# Altium PCB PCB.PcbDoc
Units mm, origin at the board's own origin, x right, y up, seen from the top; angles counter-clockwise.
Board outline 41.5 x 41.5 mm, 2 copper layers (Top Layer, Bottom Layer); 42 components, 49 nets, 202 pads, 78 vias.
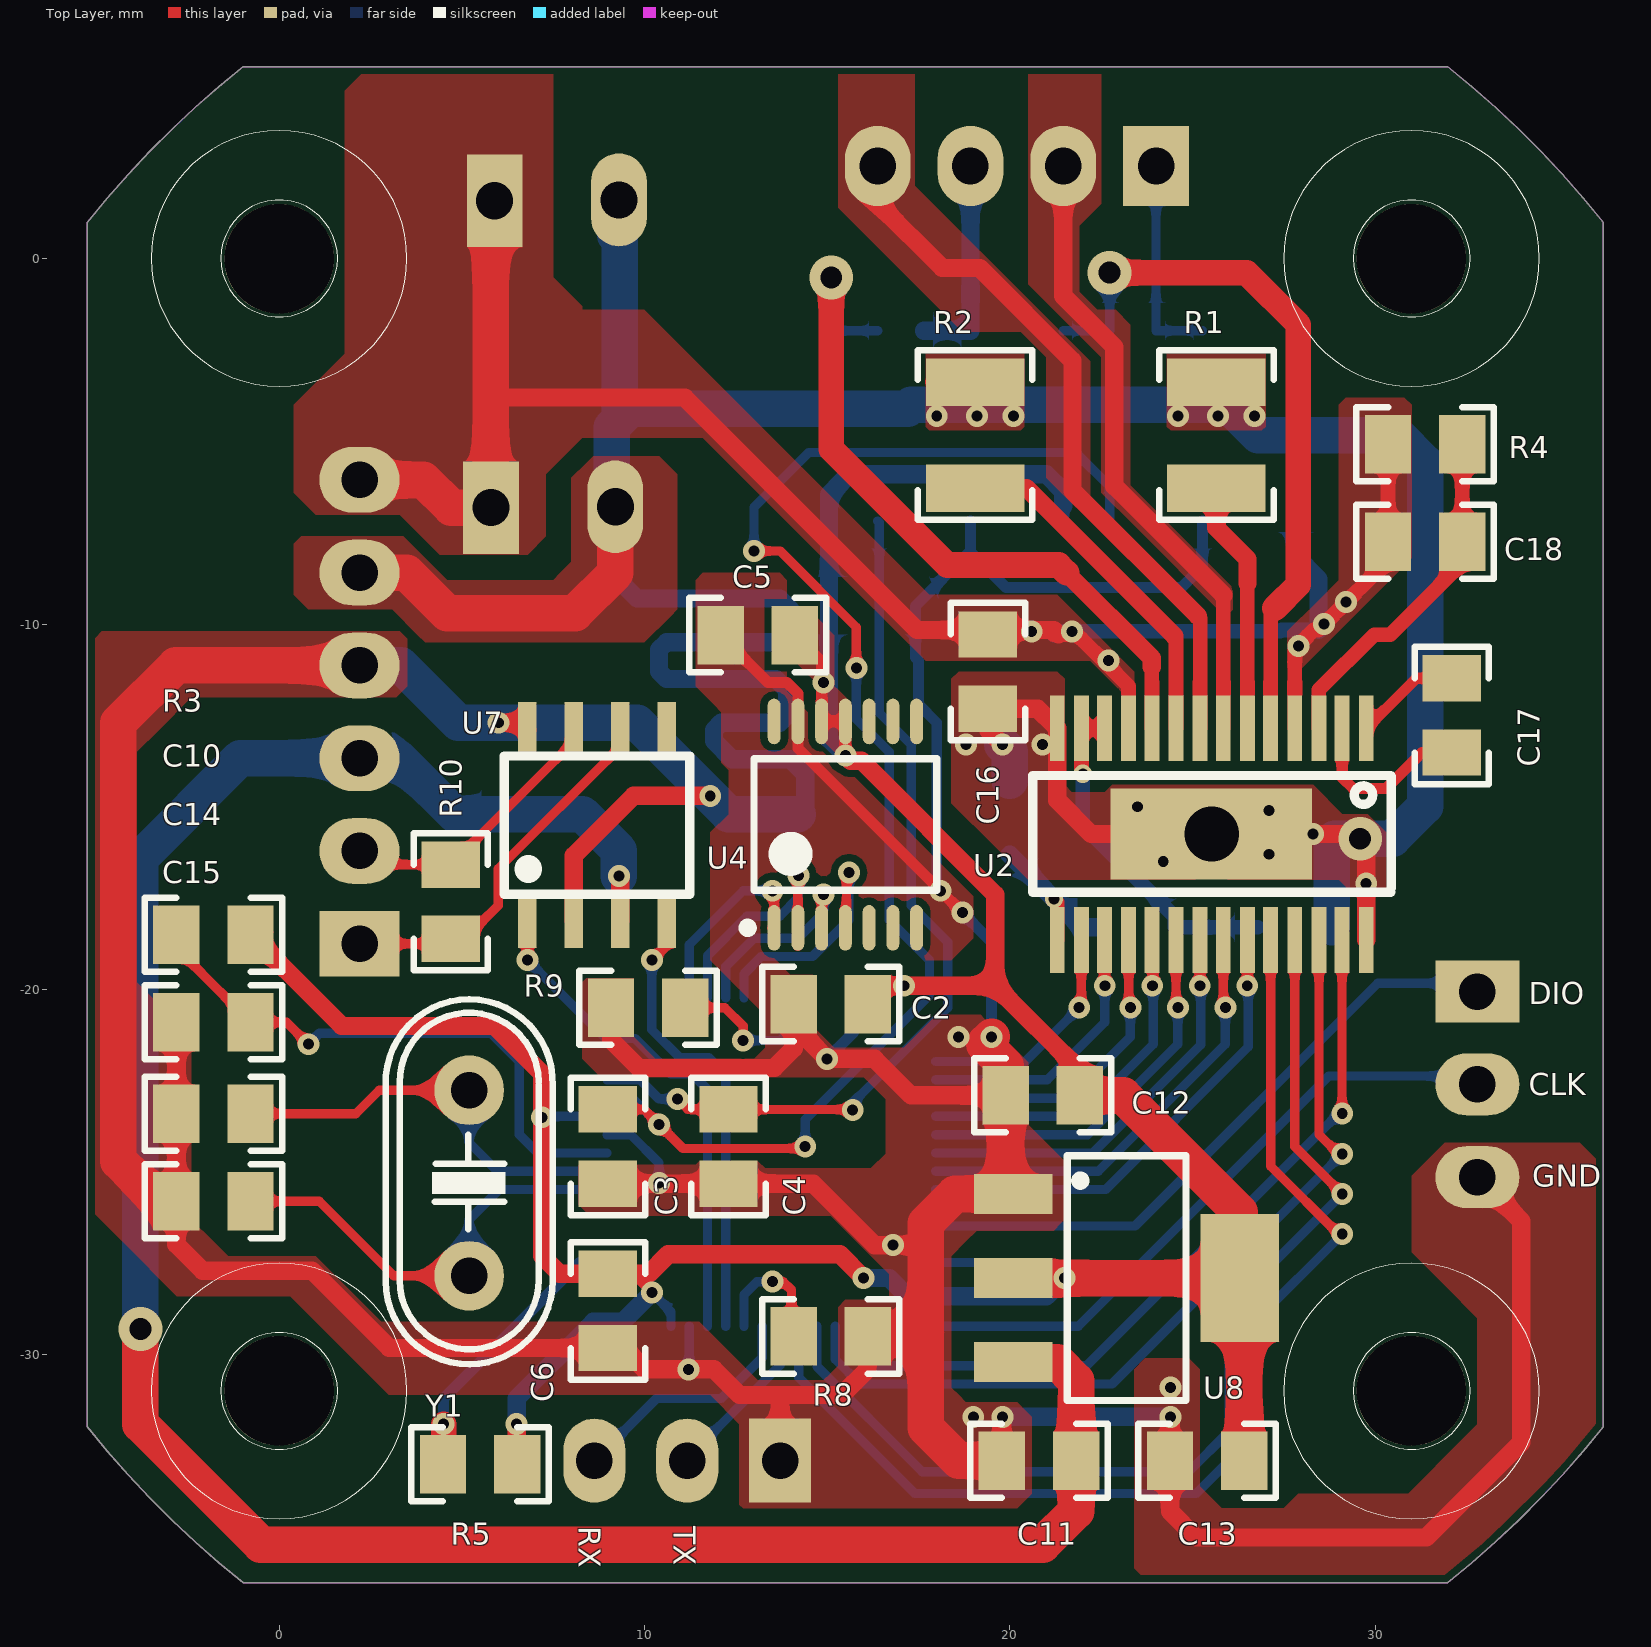
[diagram p0: Top Layer view]
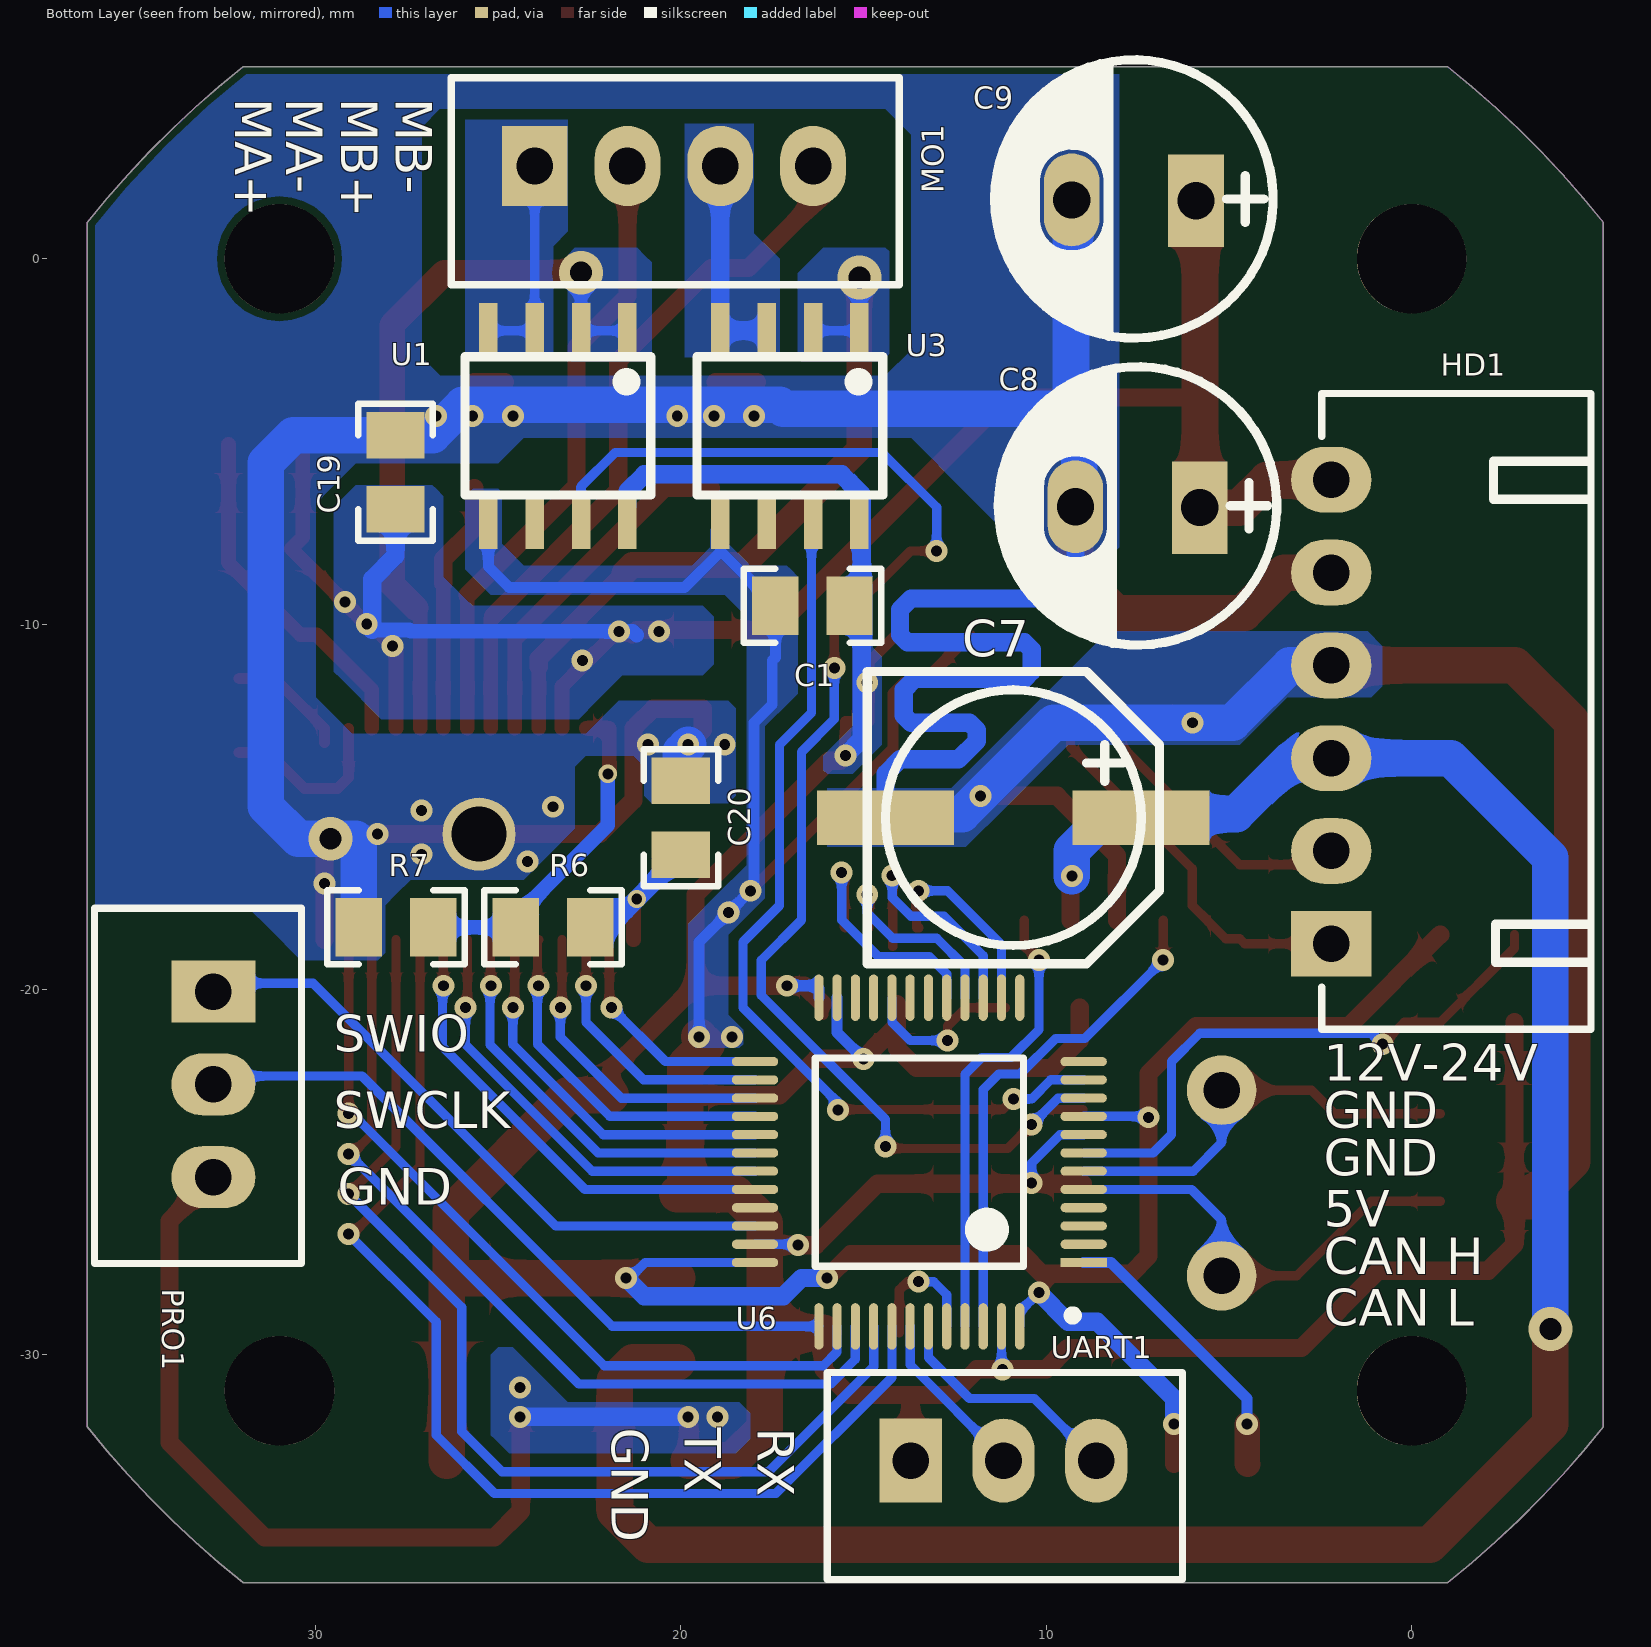
[diagram p1: Bottom Layer view, seen from below]

## Layer stack, top to bottom
Top Solder: solder mask 0.0102, Solder Resist, Dk 3.5
Top Layer: signal copper 0.0356
Dielectric 1: dielectric 0.32, FR-4, Dk 4.8
Bottom Layer: signal copper 0.0356
Bottom Solder: solder mask 0.0102, Solder Resist, Dk 3.5

## Board outline
-5.252,-31.972 ccw(c15.499,-15.489) -0.984,-36.24 -0.984,-36.239 31.982,-36.239 31.981,-36.24 ccw(c15.499,-15.489) 36.249,-31.972 36.249,0.994 36.249,0.993 ccw(c15.499,-15.489) 31.981,5.261 31.982,5.261 -0.984,5.261 ccw(c15.499,-15.489) -5.252,0.993 -5.251,0.994

## Design rules (kind name [scope] priority, off if disabled: settings)
Clearance [All] p1: gap=0.2
HoleSize [All] p1: absolutevalues=TRUE maxlimit=2.54 minlimit=0.3 maxpercent=80.000 minpercent=20.000
MinimumSolderMaskSliver [All] p1: minsoldermaskwidth=0
PolygonConnect [All] p1: connectstyle=Direct reliefconductorwidth=0.254 reliefentries=4 polygonreliefangle="90 Angle" airgapwidth=0.254
RoutingVias [All] p1: holewidth=1 width=2 viastyle="Through Hole" minholewidth=0.3 minwidth=0.3 maxholewidth=2 maxwidth=5
SilkToBoardRegionClearance [All] p1 off:
SilkToSolderMaskClearance [IsPad] p1: minsilkscreentomaskgap=0 clearancetoexposedcopper=TRUE
SolderMaskExpansion [All] p1: expansion=0.102
Width [All] p1: maxlimit=2.54 minlimit=0.254 preferedwidth=0.508
26 further rules are at their usual default settings.

## Components (designator, comment, footprint, x,y, rotation, side; value= is the part's Value field where it differs from the comment)
C1 "104" 0805_HV 16.4,-9.5 r180 bottom
C2 "104" 0805_HV 15.1,-20.4 r0 top
C3 "104" 0805_HV 9,-24.3 r90 top
C4 "104" 0805_HV 12.3,-24.3 r90 top
C5 "104" 0805_HV 13.1,-10.3 r0 top
C6 "104" 0805_HV 9,-28.8 r90 top
C7 "330uF" TU_NHOM_220uF_25V_MH 10.9,-15.3 r90 bottom
C8 "390uF" CP1/3.0 7.5,-6.8 r0 bottom
C9 "390uF" CP1/3.0 7.6,1.6 r0 bottom
C10 "104" 0805_HV -1.8,-20.9 r0 top
C11 "105" 0805_HV 20.8,-32.9 r0 top
C12 "105" 0805_HV 20.9,-22.9 r0 top
C13 "105" 0805_HV 25.4,-32.9 r0 top
C14 "22P" 0805_HV -1.8,-23.4 r0 top
C15 "22P" 0805_HV -1.8,-25.8 r0 top
C16 "103" 0805_HV 19.4,-11.3 r90 top
C17 "103" 0805_HV 32.1,-12.5 r90 top
C18 "0.1uF" 0805_HV 31.369,-7.747 r180 top
C19 "103" 0805_HV 27.813,-5.842 r270 bottom
C20 "0.47uF" 0805_HV 20,-15.3 r270 bottom
HD1 "Header 6 Cong_MH" "HEADER 6 CONG" 2.2,-12.4 r90 bottom locked
MO1 "Header 4_MH" "HEADER 4" 20.193,2.54 r180 bottom locked
PRO1 "Header 3_MH" "HEADER 3" 32.8,-22.6 r270 bottom locked
R1 "RT0603DRE07140KL" 1210 25.654,-4.826 r90 top
R2 "RT0603DRE07140KL" 1210 19.05,-4.826 r90 top
R3 "10K" 0805_HV -1.8,-18.5 r0 top
R4 "1M" 0805_HV 31.369,-5.08 r180 top
R5 "0R" 0805_HV 5.5,-33 r0 top
R6 "50K" 0805_HV 23.5,-18.3 r180 bottom
R7 "30K" 0805_HV 27.8,-18.3 r180 bottom
R8 "100K" 0805_HV 15.1,-29.5 r180 top
R9 "100K" 0805_HV 10.1,-20.5 r180 top
R10 "120" 0805_HV 4.7,-17.6 r90 top
U1 "ACS711" "SOP 8" 23.368,-4.572 r0 bottom
U2 "DRV8841PWPR" TSSOP-28EP 25.527,-15.748 r270 top
U3 "ACS711" "SOP 8" 17.018,-4.572 r0 bottom
U4 "AS5047D" TSSOP14 15.499,-15.489 r90 top locked
U6 "STM32F103C8T6 LQFP48 _MH" LQFP48 13.5,-24.7 r0 bottom locked
U7 "TJA1050T/CM,118" "SOP 8" 8.7,-15.5 r0 top
U8 "AMS1117-3.3V SOT223 _MH" SOT223 23.2,-27.9 r270 top locked
UART1 "Header 3_MH" "HEADER 3" 11.17,-32.9 r180 bottom
Y1 "8MHZ" XT2 5.2,-25.3 r270 top locked

## Footprints (in the part's own frame and the unit in brackets; to place one, negate y for a bottom-side part, rotate by r counter-clockwise, add the part's x,y. Pads: shape width x height; smd on the part's side, far side on the other; paste and mask are expansions set on the pad)
0805_HV [mil] "0805 with 30mil clearance between pads"
  rect 50x63 smd: 1(-40,0) 2(40,0)
  silkscreen extent -74,-40 74,40, body extent -43,-29 43,29, height 57
1210 [mm] "1210 from SM-752 data"
  rect 1.3x2.7 smd: 1(1.45,0) 2(-1.45,0)
  silkscreen extent -2.32,-1.57 2.32,1.57, body extent -1.7,-1.35 1.7,1.35, height 1.35
CP1/3.0 [mil]
  rect 60x100 hole 40: 1(-67,0.5)
  oval 60x100 hole 40: 2(67,-0.5)
  silkscreen extent -150,-151 150,148, body extent -156,-161 159,154, height 453
"HEADER 3" [mm]
  rect 1.7x2.3 hole 1 paste+0: 1(-2.54,0)
  oval 1.7x2.3 hole 1 paste+0: 2(0,0) 3(2.54,0)
  silkscreen extent -4.83,-3.25 4.9,2.41
"HEADER 4" [mm]
  rect 1.8x2.2 hole 1: 1(-3.81,0)
  oval 1.8x2.2 hole 1: 2(-1.27,0) 3(1.27,0) 4(3.81,0)
  silkscreen extent -6.1,-3.25 6.17,2.41
"HEADER 6 CONG" [mm]
  rect 1.8x2.2 hole 1: 1(-6.35,0)
  oval 1.8x2.2 hole 1: 2(-3.81,0) 3(-1.27,0) 4(1.27,0) 5(3.81,0) 6(6.35,0)
  silkscreen extent -8.69,-7.11 8.71,0.25
LQFP48 [mm]
  rect 1.27x0.25 smd: 1(-4.524,2.775)
  oval 1.27x0.25 smd: 2(-4.524,2.275) 3(-4.524,1.775) 4(-4.524,1.275) 5(-4.524,0.775) 6(-4.524,0.275) 7(-4.524,-0.225) 8(-4.524,-0.725) 9(-4.524,-1.225) 10(-4.524,-1.725) 11(-4.524,-2.225) 12(-4.524,-2.725) 25(4.473,-2.725) 26(4.473,-2.225) 27(4.473,-1.725) 28(4.473,-1.225) 29(4.473,-0.725) 30(4.473,-0.225) 31(4.473,0.275) 32(4.473,0.775) 33(4.473,1.275) 34(4.473,1.775) 35(4.473,2.275) 36(4.473,2.775)
  oval 0.25x1.27 smd: 13(-2.775,-4.473) 14(-2.275,-4.473) 15(-1.775,-4.473) 16(-1.275,-4.473) 17(-0.775,-4.473) 18(-0.275,-4.473) 19(0.225,-4.473) 20(0.725,-4.473) 21(1.225,-4.473) 22(1.725,-4.473) 23(2.225,-4.473) 24(2.725,-4.473) 37(2.725,4.524) 38(2.225,4.524) 39(1.725,4.524) 40(1.225,4.524) 41(0.725,4.524) 42(0.225,4.524) 43(-0.275,4.524) 44(-0.775,4.524) 45(-1.275,4.524) 46(-1.775,4.524) 47(-2.275,4.524) 48(-2.775,4.524)
  silkscreen extent -4.35,-2.82 2.82,4.35, body extent -4.53,-4.47 4.47,4.53, height 1.5
"SOP 8" [mil]
  rect 20x60 smd: 1(-75,-102.5) 2(-25,-102.5) 3(25,-102.5) 4(75,-102.5) 5(75,102.5) 6(25,102.5) 7(-25,102.5) 8(-75,102.5)
  silkscreen extent -100,-74 100,74, body extent -98,-120 100,117, height 63
SOT223 [mm] "SOT-223/SC-73; 4 Leads; Body 6.7 x 7.3 mm, inc. leads (LxW max)"
  rect 1.1x2.15 smd: 1(-2.3,-3.1) 2(0,-3.1) 3(2.3,-3.1)
  rect 3.5x2.15 smd: 4(0,3.1)
  silkscreen extent -3.35,-1.63 3.35,1.63, body extent -3.43,-1.65 3.43,1.65, height 2.54
TSSOP14 [mm] "TSSOP, 14-Leads, Body 5.00x4.40mm, Pitch 0.65mm, IPC High Density"
  oval 1.25x0.35 smd: 1(-2.825,1.95) 2(-2.825,1.3) 3(-2.825,0.65) 4(-2.825,0) 5(-2.825,-0.65) 6(-2.825,-1.3) 7(-2.825,-1.95) 8(2.825,-1.95) 9(2.825,-1.3) 10(2.825,-0.65) 11(2.825,0) 12(2.825,0.65) 13(2.825,1.3) 14(2.825,1.95)
  silkscreen extent -2.95,-2.5 1.8,2.8, body extent -3.23,-2.55 3.23,2.55, height 1.25
TSSOP-28EP [mil]
  rect 71x16 smd: 1(-114,166.5) 2(-114,140.5) 3(-114,115.5) 4(-114,89.5) 5(-114,63.5) 6(-114,38.5) 7(-114,12.5) 8(-114,-12.5) 9(-114,-38.5) 10(-114,-64.5) 11(-114,-89.5) 12(-114,-115.5) 13(-114,-140.5) 14(-114,-166.5) 15(114,-166.5) 16(114,-140.5) 17(114,-115.5) 18(114,-89.5) 19(114,-64.5) 20(114,-38.5) 21(114,-12.5) 22(114,12.5) 23(114,38.5) 24(114,63.5) 25(114,89.5) 26(114,115.5) 27(114,140.5) 28(114,166.5)
  rect 98x217 smd: 29(0,-0.5)
  silkscreen extent -63,-193 63,194, body extent -126,-191 126,191, height 46
TU_NHOM_220uF_25V_MH [mm]
  rect 1.5x3.75 smd: 1(0,-3.5) 2(0,3.5)
  silkscreen extent -4,-4 4,4, body extent -4.15,-5 4.15,4, height 11.23
XT2 [mm] "Footpin for Crystal 2 pin"
  round 1.905 hole 1: 1(-2.54,0) 2(2.54,0)
  silkscreen extent -5.03,-2.29 4.96,2.29, body extent -5.93,-2.36 5.42,2.29, height 3.5

## Part data
C1 C2 C3 C4 C5 C6 C10 C16 C17 C18 C19 C20: library part "Capacitor 0805", "Ceramic Chip Capacitor - Standard"
C7: library part TU_NHOM_330uF_16V_MH, "TU_NHOM_330uF_16V_MH"
C8 C9: library part "Capacitor TuHoa"
C11 C12 C13 C14 C15: library part CM, "Cap SMD"
HD1: "Header 6P XH2.54 cong"
MO1: "Header 4P XH2.54 th?ng"
PRO1 UART1: "Header 3P XH2.54 th?ng"
R1 R2: "RES, 140 k, 0.5%, 0.1 W, 0603"
R3 R4 R5 R6 R7 R8 R9 R10: library part "R nho", "RES, 100, 1%, 0.1 W, 0402"
U1 U3: library part ACS712
Y1: library part "CRYSTAL_49S DIP_MH", "Crystal Oscillator"

## Free pads (board coordinates)
  round 3 hole 3: 0(0,-30.988) 0(0,0) 0(30.988,-30.988) 0(30.988,0)
  round 2 hole 1.5: 0(25.527,-15.748)

## Via types
v1: diameter 0.6, hole 0.3, Top Layer to Bottom Layer, tented both sides, 66 vias
v2: diameter 0.6, hole 0.3, Top Layer to Bottom Layer, 6 vias
v3: diameter 1.2, hole 0.6, Top Layer to Bottom Layer, tented both sides, 4 vias
v4: diameter 0.5, hole 0.3, Top Layer to Bottom Layer, tented both sides, 2 vias

## Nets (pads, with @x,y where several pads share a name; then routed paths per layer and width w, separated by ;. In a path a pad name is that pad's centre, name@x,y a point inside that pad or via, vN(x,y) a via of type N, cw(c..) or ccw(c..) an arc to the next point about the centre after c; other vN are vias at no path point)
3.3V: C1.2 C2.2 C5.2 C6.2 C12.2 C13.2 R3.2 R5.2 U1.8 U3.8 U4.11 U4.12 U6.9 U6.24 U6.36 U6.48 U8.2 U8.4 | length 99.3
  Top Layer w0.254: C6.2@9.684,-27.784 v1(10.2,-28.3)
  Top Layer w0.3: R5.2@6.5,-32.984 R5.2 ; C5.2 14.849,-11.033 U4.12 U4.11 15.5,-12.666 v1(15.5,-13.6) ; C2.2@16.116,-20.684 C2.2
  Top Layer w0.5: R3.2 1.716,-21 5.9,-21 7.2,-22.3 v1(7.2,-23.5) 7.2,-27.3 7.684,-27.784 9.684,-27.784 10.116,-27.784 10.65,-27.25 15.35,-27.25 v1(16,-27.9) ; R5.2@6.5,-32.984 v2(6.5,-31.9) ; v1(15.5,-13.6) 15.639,-13.739 15.939,-13.739 19.6,-17.4 19.6,-19.9 ; C2.2 16.616,-19.9 v1(17.1,-19.9) 19.6,-19.9 ; C12.2 21.916,-22.216 19.6,-19.9
  Top Layer w1: U8.2 U8.4 ; C12.2 23.1,-22.9 26.3,-26.1 U8.4 ; C13.2 26.416,-28.016 U8.4
  Bottom Layer w0.254: v1(7.2,-23.5) 7.225,-23.475 U6.9 ; v1(10.2,-28.3) 10.725,-28.825 U6.48 ; U6.36 20.975,-27.475 21.4,-27.9 v1(21.5,-27.9)
  Bottom Layer w0.3: U6.24 16.225,-19.975 16.3,-19.9 v1(17.1,-19.9) ; U1.8 U1.8@21.463,-6.763
  Bottom Layer w0.5: v2(6.5,-31.9) 6.5,-31.2 8.6,-29.1 9.4,-29.1 v1(10.2,-28.3) ; v1(15.5,-13.6) 15.05,-13.15 15.05,-6.45 15.6,-5.9 21,-5.9 21.463,-6.363 U1.8@21.463,-6.763 ; v1(16,-27.9) 16.7,-27.9 17.2,-28.4 21,-28.4 v1(21.5,-27.9)
  other v2: 14.9,-11.6
5V: C7.1 C11.2 HD1.3 U7.3 U8.3 | length 65.6
  Top Layer w0.5: v1(9.3,-16.9) 9.335,-16.935 U7.3
  Top Layer w1: v3(-3.8,-29.3) -3.8,-31.9 -0.5,-35.2 20.9,-35.2 21.816,-34.284 C11.2 21.816,-30.716 21.3,-30.2 U8.3
  Bottom Layer w1: v3(-3.8,-29.3) -3.8,-16.4 -1.07,-13.67 HD1.3 3.27,-13.67 4.8,-15.2 7.2,-15.2 8.3,-15.2 9.3,-16.2 v1(9.3,-16.9)
AI0: U2.24 U6.41 | length 31.2
  Top Layer w0.254: U2.24 27.14,-24.84 v1@29.05,-26.75
  Bottom Layer w0.254: U6.41 14.225,-30.625 17.4,-33.8 25.1,-33.8 26.7,-32.2 26.7,-29.1 v1(29.1,-26.7)
AI1: U2.25 U6.40 | length 29.3
  Top Layer w0.254: U2.25 27.8,-24.3 v1(29.1,-25.6)
  Bottom Layer w0.254: U6.40 14.725,-30.325 17.6,-33.2 24.9,-33.2 26,-32.1 26,-28.7 v1(29.1,-25.6)
BI1: U2.26 U6.39 | length 24
  Top Layer w0.254: U2.26 28.461,-23.961 29.1,-24.6 v1(29.1,-24.5)
  Bottom Layer w0.254: U6.39 15.225,-30.125 15.9,-30.8 22.8,-30.8 v1(29.1,-24.5)
BI2: U2.27 U6.38 | length 21.8
  Top Layer w0.254: U2.27 29.096,-23.396 v1(29.1,-23.4)
  Bottom Layer w0.254: U6.38 15.725,-29.925 16.1,-30.3 22.1,-30.3 29,-23.4 v1(29.1,-23.4)
BOOT0: R8.2 U6.44 | length 3.6
  Top Layer w0.254: v1(13.5,-28) 13.8,-28 14.025,-28.225 R8.2@14.025,-29.4
  Bottom Layer w0.254: U6.44 12.725,-28.357 13.082,-28 v1(13.5,-28)
BOOT1: R9.1 U6.20 | length 4.6
  Top Layer w0.254: R9.1 12.2,-20.5 12.7,-21 v1(12.7,-21.4)
  Bottom Layer w0.254: v1(12.7,-21.4) 13.725,-21.4 14.225,-20.9 U6.20
CAN_H: HD1.2 R10.2 U7.7 | length 6.9
  Top Layer w0.254: HD1.2@2.574,-16.584 R10.2 U7.7@8.065,-13.219
CAN_L: HD1.1 R10.1 U7.6 | length 10.4
  Top Layer w0.254: HD1.1 4.566,-18.75 R10.1 5.084,-18.616 6,-17.7 6,-16.7 9.335,-13.365 U7.6
CAN_RX: U6.45 U7.4 | length 12.6
  Top Layer w0.254: v1(10.2,-19.2) 10.605,-18.795 U7.4
  Bottom Layer w0.254: v1(10.2,-19.2) 10.2,-21.1 10.962,-21.862 11.762,-21.862 12.225,-22.325 U6.45
CAN_TX: U6.46 U7.1 | length 14
  Top Layer w0.254: U7.1 6.795,-19.195 v1(6.8,-19.2)
  Bottom Layer w0.254: v1(6.8,-19.2) 8.942,-21.342 9.742,-21.342 10.716,-22.316 11.3,-22.316 11.725,-22.741 U6.46
CLK: U4.2 U6.15 | length 7
  Top Layer w0.254: U4.2@14.199,-18.824 U4.2 14.199,-16.801 14.216,-16.818 v1(14.216,-16.884)
  Bottom Layer w0.254: U6.15 11.725,-19.075 12.8,-18 13.7,-18 14.216,-17.484 v1(14.216,-16.884)
CSN: U4.1 U6.14 | length 5.4
  Top Layer w0.254: U4.1@13.486,-18.314 U4.1 13.549,-17.349 v1(13.5,-17.3)
  Bottom Layer w0.254: U6.14 11.225,-18.775 12.7,-17.3 v1(13.5,-17.3)
DECAY: U2.19 U6.28 | length 9.7
  Top Layer w0.254: U2.19 23.927,-18.682 23.927,-19.873 v1(23.9,-19.9)
  Bottom Layer w0.254: U6.28 21.952,-23.475 23.927,-21.5 23.927,-19.927 v1(23.9,-19.9)
GND: C1.1 C2.1 C3.1 C4.1 C5.1 C6.1 C7.2 C8.2 C9.2 C10.1 C11.1 C12.1 C13.1 C14.1 C15.1 C16.1 C19.1 C20.1 HD1.4 HD1.5 pad.0@25.527,-15.748 PRO1.3 R1.1 R2.1 R7.1 R8.1 R9.2 U1.5 U2.14 U2.28 U2.29 U3.5 U4.13 U6.8 U6.23 U6.35 U6.47 U7.2 U7.8 U8.1 UART1.1 | length 278.4
  Top Layer w0.254: C9.2@9.195,0.648 C9.2@9.322,0.521
  Top Layer w0.3: C5.1@12.1,-10.284 C5.1 13.384,-11.6 13.9,-11.6 14.199,-11.899 U4.13 14.199,-13.399 v1(18.7,-17.9) ; v1@19.784,-31.784 19.784,-31.716 v1(19.8,-31.7) ; v1@24.384,-31.716 v1(24.4,-31.7)
  Top Layer w0.5: C10.1 C14.1 C15.1 -2.816,-26.984 -2.1,-27.7 0.9,-27.7 3.016,-29.816 C6.1 9.416,-29.816 10,-30.4 v1(11.2,-30.4) 11.9,-30.4 12.6,-31.1 13.6,-31.1 ; v1(6,-12.7) 6.599,-12.7 U7.8 ; U7.2 8.065,-16.335 9.7,-14.7 v1(11.8,-14.7) ; C3.1 C4.1 14.616,-25.316 16.3,-27 v1(16.8,-27) 17.7,-27 ; R9.2 9.084,-21.384 9.85,-22.15 13.55,-22.15 14.084,-21.616 C2.1@14.084,-20.984 ; UART1.1 13.71,-31.21 13.6,-31.1 ; C2.1 C2.1@14.084,-20.984 ; R8.1@16.1,-29.4 16.1,-30.4 15.4,-31.1 13.6,-31.1 ; R2.1@17.924,-3.376 R2.1 ; C16.1 C16.1@19.4,-12.319 ; C11.1 v1@19.784,-31.784 ; v1(19.8,-13.3) 19.4,-12.9 C16.1@19.4,-12.319 ; C12.1 17.3,-22.9 16.3,-21.9 v1(15,-21.9) C2.1@14.084,-20.984 ; U2.14@21.225,-12.779 20.764,-12.319 C16.1@19.4,-12.319 ; U2.14 21.298,-14.821 22.225,-15.748 U2.29 25.527,-15.748 v3@29.337,-15.748 ; v1@24.384,-31.716 C13.1 24.384,-34.284 25.1,-35 31.4,-35 34,-32.4 34,-26.34 PRO1.3 ; R1.1@24.824,-3.376 R1.1 ; U2.28 v3@29.756,-16.167
  Top Layer w1: C15.1 -3.3,-25.8 -4.4,-24.7 -4.4,-12.7 -2.83,-11.13 HD1.4 ; HD1.5 3.49,-8.59 4.6,-9.7 8.1,-9.7 9.202,-8.598 C8.2 ; R8.1@16.1,-29.4 17.7,-29.4 ; v1(19.5,-21.3) 19.3,-21.5 19.884,-22.084 C12.1 U8.1@19.884,-25.384 ; C11.1 18.6,-32.9 17.7,-32 17.7,-29.4 ; U8.1 18.5,-25.6 17.7,-26.4 17.7,-27 17.7,-29.4
  Bottom Layer w0.254: U6.8 9.625,-23.975 10.4,-24.75 v1(10.4,-25.3) ; v1(11.2,-30.4) 11.225,-30.375 U6.47 ; v1(16.8,-27) 16.825,-26.975 U6.35
  Bottom Layer w0.3: v1(15,-21.9) 15.725,-21.175 U6.23 ; U3.5 18.923,-7.993 ; v1(19.5,-21.3) 19.5,-18.7 v1(18.7,-17.9) 18,-17.2 18,-12.7 17.5,-12.2 17.5,-11 17.416,-10.916 C1.1 18.923,-7.993 ; U1.5 25.273,-8.427 24.7,-9 19.9,-9 18.923,-8.023 18.923,-7.993
  Bottom Layer w0.5: C8.2 9.202,-8.702 9.8,-9.3 13.7,-9.3 14,-9.6 14,-10.3 13.8,-10.5 10.6,-10.5 10.4,-10.7 10.4,-11.3 10.6,-11.5 13.6,-11.5 13.9,-11.8 13.9,-12.5 13.7,-12.7 12.1,-12.7 11.9,-12.9 11.9,-13.2 12.4,-13.7 14,-13.7 14.4,-14.1 C7.2 ; v1(19.8,-31.7) v1(24.4,-31.7)
  Bottom Layer w1: HD1.4 3.33,-11.13 4.9,-12.7 v1(6,-12.7) 9.8,-12.7 12.3,-15.2 C7.2@14.2,-15.2 ; C8.2@9.1,-7.512 9.1,-4.616 9.616,-4.1 17.2,-4.1 ; C9.2@9.195,0.648 9.322,0.521 9.322,-4.394 ; 17.3,-4 25.971,-4 26.797,-4.826 C19.1 30.607,-4.826 31.369,-5.588 31.369,-14.986 30.48,-15.875 v3(29.591,-15.875) 28.9,-15.875 28.816,-15.959 R7.1 ; v1(19.8,-13.3) 20,-13.5 C20.1
  other v1: 18.6,-21.3 29.756,-17.1 24.2,-16.5 27.1,-16.3 28.3,-15.748 27.1,-15.1 23.5,-15 18.8,-13.3 20.9,-13.3 18,-4.3 19.1,-4.3 20.1,-4.3 24.6,-4.3 25.7,-4.3 26.7,-4.3
  other v2: 19,-31.7 24.4,-30.9 18.1,-17.3
IA: C3.2 U1.7 U6.10 | length 40.6
  Top Layer w0.254: C3.2 9.984,-23.284 v1(10.4,-23.7) 11.054,-24.354 v1@14.446,-24.354 ; v1(13,-8) 13.714,-8 15.8,-10.086 v1(15.8,-11.2)
  Bottom Layer w0.254: U6.10 9.675,-22.975 v1(10.4,-23.7) ; v1(13,-8) 13,-6.8 14.5,-5.3 21.8,-5.3 22.733,-6.233 U1.7 ; v1(14.4,-24.3) 14.4,-23.558 17.8,-20.158 17.8,-19.2 16.7,-18.1 16.7,-13.5 15.8,-12.6 v1(15.8,-11.2)
IB: C4.2 U3.7 U6.11 | length 25.2
  Top Layer w0.254: v1(10.9,-23) 11.184,-23.284 C4.2 15.716,-23.284 v1@15.8,-23.2
  Bottom Layer w0.254: U6.11 9.875,-22.475 10.4,-23 v1(10.9,-23) ; v1(15.7,-23.3) 15.7,-23.099 18.3,-20.499 18.3,-18.7 17.3,-17.7 17.3,-13.3 16.427,-12.427 16.427,-7.219 U3.7
MA+: MO1.1 U1.3 U1.4 | length 5.8
  Bottom Layer w0.254: MO1.1 U1.3 U1.4
MA-: MO1.2 U2.7 | length 17.2
  Top Layer w0.4: U2.7 25.845,-9.207
  Top Layer w0.5: MO1.2 21.463,-1.016 22.86,-2.413 22.86,-6.223 25.845,-9.207
MB+: MO1.3 U3.3 U3.4 | length 5.8
  Bottom Layer w0.5: U3.3 U3.4 MO1.3
MB-: MO1.4 U2.8 | length 19.6
  Top Layer w0.4: 25.146,-9.779 25.209,-9.842 U2.8
  Top Layer w0.5: MO1.4 16.383,1.517 18.154,-0.254 19.177,-0.254 21.717,-2.794 21.717,-6.35 25.146,-9.779
MISO: U4.3 U6.16 | length 5.6
  Top Layer w0.254: U4.3 14.849,-17.451 v1(14.9,-17.4)
  Bottom Layer w0.254: U6.16 12.225,-19.375 13,-18.6 14.2,-18.6 14.9,-17.9 v1(14.9,-17.4)
MOSI: U4.4 U6.17 | length 7
  Top Layer w0.254: U4.4 15.527,-18.286 15.527,-16.873 v1(15.6,-16.8)
  Bottom Layer w0.254: U6.17 12.725,-19.575 13.2,-19.1 14.6,-19.1 15.6,-18.1 v1(15.6,-16.8)
MOTOR_EN: U2.17 U6.26 | length 7.5
  Top Layer w0.254: U2.17 22.593,-19.893 v1(22.6,-19.9)
  Bottom Layer w0.254: U6.26 21.025,-22.475 22.6,-20.9 v1(22.6,-19.9)
MOTOR_RST: U2.16 U6.25 | length 6.1
  Top Layer w0.254: v1@21.958,-20.242 U2.16
  Bottom Layer w0.254: U6.25 20.425,-21.975 v1(21.9,-20.5)
NetC17_1: C17.1 U2.2 | length 4.9
  Top Layer w0.3: U2.2 29.096,-14.196 29.4,-14.5 30.3,-14.5 31.284,-13.516 C17.1
NetC17_2: C17.2 U2.1 | length 3.3
  Top Layer w0.3: U2.1@29.756,-13.246 U2.1 31.125,-11.484 C17.2
NetC18_1: C18.1 R4.1 U2.3 | length 9.7
  Top Layer w0.4: U2.3 28.461,-11.798 29.972,-10.287 30.413,-10.287 32.385,-8.315 R4.1
NetR1_2: R1.2 U2.6 | length 6.9
  Top Layer w0.4: U2.6 26.505,-8.89
  Top Layer w0.5: R1.2 25.654,-7.366 26.505,-8.217 26.505,-8.89
NetR2_2: R2.2 U2.9 | length 9.6
  Top Layer w0.4: 24.526,-10.302 24.549,-10.325 U2.9
  Top Layer w0.5: R2.2@19.177,-6.276 20.453,-6.276 24.502,-10.325
NetR6_1: R6.1 R7.2 U2.12 U2.13 | length 9.4
  Top Layer w0.4: v4(22,-14.1) 21.958,-14.058 U2.13 U2.12
  Bottom Layer w0.4: v4(22,-14.1) 22,-15.5 24.516,-18.016 R6.1 R7.2
NetU1_1: U1.1 U1.2 U2.5 | length 20
  Top Layer w0.4: U2.5 27.14,-9.563 27.197,-9.506
  Top Layer w0.7: v3(22.733,-0.381) 26.481,-0.381 27.9,-1.8 27.9,-8.918 27.255,-9.563
  Bottom Layer w0.254: U1.1 U1.2 v3(22.733,-0.381)
NetU2_10: U2.10 U3.1 U3.2 | length 20.5
  Top Layer w0.4: U2.10 23.889,-11.176
  Top Layer w0.5: 21.554,-8.6 23.889,-10.935 23.889,-11.176
  Top Layer w0.7: v3(15.113,-0.508) 15.113,-5.207 18.288,-8.382 21.336,-8.382 21.554,-8.6
  Bottom Layer w0.254: v3(15.113,-0.508) U3.1 U3.2
NFAULT: U2.18 U6.27 | length 8.7
  Top Layer w0.254: U2.18 23.254,-20.454 v1(23.3,-20.5)
  Bottom Layer w0.254: U6.27 21.625,-22.975 23.3,-21.3 v1(23.3,-20.5)
OSCIN: C15.2 U6.5 Y1.2 | length 12.5
  Top Layer w0.254: C15.2 1.1,-25.8 3.14,-27.84 Y1.2
  Bottom Layer w0.254: Y1.2 5.2,-26.3 6.025,-25.475 U6.5
OSCOUT: C14.2 U6.6 Y1.1 | length 11.8
  Top Layer w0.254: C14.2 2.1,-23.4 2.74,-22.76 Y1.1
  Bottom Layer w0.254: Y1.1 5.2,-24.2 5.975,-24.975 U6.6
PWM_CH1: U2.20 U6.29 | length 10.5
  Top Layer w0.254: U2.20 24.549,-20.449 v1(24.6,-20.5)
  Bottom Layer w0.254: U6.29 22.125,-23.975 24.6,-21.5 v1(24.6,-20.5)
PWM_CH2: U2.21 U6.30 | length 11.4
  Top Layer w0.254: v1(25.2,-19.9) 25.209,-19.891 U2.21
  Bottom Layer w0.254: U6.30 22.267,-24.475 25.227,-21.515 25.227,-19.927 v1(25.2,-19.9)
PWM_CH3: U2.22 U6.31 | length 12.2
  Top Layer w0.254: v1@25.845,-20.445 U2.22
  Bottom Layer w0.254: U6.31 22.425,-24.975 25.9,-21.5 v1(25.9,-20.5)
PWM_CH4: U2.23 U6.32 | length 13.1
  Top Layer w0.254: v1(26.5,-19.9) 26.505,-19.895 U2.23
  Bottom Layer w0.254: U6.32 22.625,-25.475 26.527,-21.573 26.527,-19.927 v1(26.5,-19.9)
RST: C10.2 R3.1 U6.7 | length 15.9
  Top Layer w0.254: R3.1 -2.816,-18.868 C10.2 0.2,-20.9 v1(0.8,-21.5)
  Bottom Layer w0.254: v1(0.8,-21.5) 1.1,-21.2 5.8,-21.2 6.573,-21.973 6.573,-23.973 7.075,-24.475 U6.7
RX: U6.43 UART1.3 | length 6.6
  Bottom Layer w0.254: UART1.3 10.33,-31.2 12.1,-31.2 13.225,-30.075 U6.43
SWCLK: PRO1.2 U6.37 | length 19.3
  Bottom Layer w0.254: U6.37 21.876,-29.224 28.73,-22.37 PRO1.2@32.7,-22.37
SWDIO: PRO1.1 U6.34 | length 17.5
  Bottom Layer w0.254: U6.34 23.425,-26.475 30.07,-19.83 PRO1.1@32.7,-19.83
TX: U6.42 UART1.2 | length 4.7
  Bottom Layer w0.254: UART1.2 11.17,-32.83 13.725,-30.275 U6.42
V3P3OUT: C20.2 R6.2 U2.15 | length 4.5
  Top Layer w0.4: v4(21.209,-17.526) 21.298,-17.615 U2.15
  Bottom Layer w0.5: C20.2 v4(21.209,-17.526) 21.983,-18.3 R6.2
VBAT: R5.1 U6.1 | length 7.8
  Top Layer w0.7: R5.1 4.5,-32.984 v2(4.5,-31.9)
  Bottom Layer w0.3: v2(4.5,-31.9) 4.5,-31.2 8.225,-27.475 U6.1
VCC_MO: C8.1 C9.1 C16.2 C18.2 C19.2 HD1.6 R4.2 U2.4 U2.11 | length 56.2
  Top Layer w0.4: 21.209,-10.287 21.336,-10.287 21.844,-10.287 23.254,-11.697 U2.11 ; U2.4 27.8,-10.681 28.321,-10.16 28.448,-10.16 30.67,-7.938 30.353,-7.62 R4.2
  Top Layer w0.5: C8.1@5.918,-6.813 5.918,-3.982 6.1,-3.8 11.1,-3.8 17.46,-10.16 21.209,-10.16 21.336,-10.287
  Top Layer w1: HD1.6 3.95,-6.05 4.713,-6.813 C8.1@5.791,-6.813 ; C9.1@5.791,0.622 C8.1@5.791,-6.813 ; C8.1 C8.1@5.791,-6.813
  Bottom Layer w0.4: 21.209,-10.287 21.209,-10.309 21.318,-10.2 27.4,-10.2 27.44,-10.16 v1@28.448,-10.16
  Bottom Layer w0.5: C19.2 27.813,-8.128 28.448,-8.763 v1@28.448,-10.16
  other v1: 22.7,-11 27.9,-10.6 20.6,-10.2 21.7,-10.2 28.6,-10 29.2,-9.4
pads on no net: U1.6 U3.6 U4.5 U4.6 U4.7 U4.8 U4.9 U4.10 U4.14 U6.2 U6.3 U6.4 U6.12 U6.13 U6.18 U6.19 U6.21 U6.22 U6.33 U7.5

## Polygon pours and split planes (outlines as drawn)
MB+ on Bottom Layer "Bottom Layer-No Net" (solid, pour order 2): 18,3.7 18,0.7 17.5,0.2 17.3,0 17.3,-1.8 17.3,-2.7 19.9,-2.7 19.9,3.7
MA+ on Bottom Layer "Bottom Layer-No Net" (solid, pour order 4): 23.1,3.8 23.1,0.75 23.5,0.35 23.5,-0.85 23.5,-2.55 23.7,-2.75 25.7,-2.75 25.9,-2.55 25.9,3.8
NetU1_1 on Bottom Layer "Bottom Layer-No Net" (solid, pour order 6): 22.7,0.3 21.2,0.3 21,0.1 20.8,-0.1 20.8,-1.3 20.8,-2.7 20.9,-2.8 22,-2.8 23,-2.8 23.1,-2.7 23.1,-1.6 23.1,0.1 22.9,0.3
NetU2_10 on Bottom Layer "Bottom Layer-No Net" (solid, pour order 8): 16.7,-2.8 14.5,-2.8 14.3,-2.6 14.3,-0.1 14.3,0.2 14.4,0.3 14.9,0.3 16.1,0.3 16.4,0 16.8,-0.4 16.8,-1.1 16.8,-2.7 16.7,-2.8
GND on Bottom Layer "Bottom Layer-No Net" (solid, pour order 10): 8,5.261 8,-1.2 8,-7.1 8,-7.9 8.5,-8.4 10,-8.4 10.2,-8.4 12.2,-6.4 13.7,-4.9 15.7,-4.9 24.3,-4.9 25,-5.6 26.9,-5.6 28.9,-5.6 29.6,-6.3 30,-6.7 30,-10.7 30,-12.7 29.5,-13.2 29.3,-13.4 27.4,-13.4 24.6,-13.4 24.3,-13.7 24.2,-13.8 24.2,-14.7 24.2,-16.6 24.6,-17 26.3,-17 27.4,-17 27.8,-17.4 28.1,-17.7 28.1,-18.7 28.1,-19 28.3,-19.2 29.3,-19.2 30.4,-19.2 31.3,-18.3 31.8,-17.8 36.249,-17.8 36.249,-3.5 36.249,-3.349 36.1,-3.2 15.6,-3.2 14.4,-3.2 13.7,-2.5 13.7,-1 13.7,5.261
GND on Bottom Layer "Bottom Layer-No Net" (solid, pour order 12): 30,-11.4 30,-11.9 30,-12 29.8,-12.2 29,-13 25.9,-13 22.6,-13 21.7,-12.1 19.3,-12.1 18.7,-12.1 18.5,-12.3 18.5,-13 18.5,-14.7 18.7,-14.9 19.7,-14.9 20.8,-14.9 21,-14.7 21,-14 21,-13.9 21.1,-13.8 21.3,-13.6 22,-13.6 22.6,-13.6 22.8,-13.8 22.9,-13.9 22.9,-14.6 22.9,-15.6 23.9,-16.6 24.3,-17 25.9,-17 31,-17 32,-16 32,-10.5 32.4,-10.1
GND on Bottom Layer "Bottom Layer-No Net" (solid, pour order 14): 13.7,2.5 13.7,3.4 14.1,3.8 14.4,4.1 15.5,4.1 26.6,4.1 27,3.7 27.1,3.6 27.1,1.9 27.1,-2.7 26.7,-3.1 26.3,-3.5 26.3,-3.9 35.749,-3.9 36.249,-3.4 36.249,0.994 31.982,5.261 31.9,5.261 10.161,5.261 9.6,4.7 9.195,4.295 9.195,0.648 9.543,0.3 12.8,0.3
VCC_MO on Bottom Layer "Bottom Layer-No Net" (solid, pour order 20): 21.4,-9.5 21.2,-9.5 19.8,-9.5 19.4,-9.5 19.2,-9.7 19.1,-9.8 19.1,-10.4 19.1,-11.1 19.3,-11.3 19.4,-11.4 20.6,-11.4 21.6,-11.4 22.3,-12.1 22.8,-12.6 24.7,-12.6 28.2,-12.6 29.3,-11.5 29.5,-11.3 29.5,-9.7 29.5,-6.8 28.9,-6.2 27.5,-6.2 26.8,-6.2 26.7,-6.3 26.5,-6.5 26.5,-7.7 26.5,-8.7 25.9,-9.3 25.7,-9.5 23.9,-9.5 21.4,-9.5
GND on Bottom Layer "Bottom Layer-No Net" (solid, pour order 36): 18.3,-21.1 18.7,-20.7 18.7,-18.5 18.5,-18.3 17.7,-17.5 17.7,-16.7 17.7,-12.8 17,-12.1 16.8,-11.9 16.8,-9.5 16.8,-8.7 17,-8.5 17.1,-8.4 17.6,-8.4 18.1,-8.4 18.2,-8.3 18.7,-7.8 18.7,-7.3 19.1,-7.3 19.2,-7.4 19.2,-7.9 19.6,-8.3 19.7,-8.4 20.4,-8.4 24.3,-8.4 24.8,-7.9 24.9,-7.8 24.9,-6.7 24.9,-6.4 25,-6.3 25.7,-6.3 25.8,-6.4 25.9,-6.5 25.9,-7.7 25.9,-8.5 25.6,-8.8 25.2,-9.2 23.4,-9.2 18.8,-9.2 18.5,-9.5 18.2,-9.8 18.2,-15.6 18.2,-16.6 19,-17.4 19.8,-18.2 19.8,-20.7 19.8,-21.4 19.6,-21.6 18.6,-21.6 18.4,-21.6 18.3,-21.5
GND on Bottom Layer "Bottom Layer-No Net" (solid, pour order 38): 16,-14.5 12.6,-14.5 10.5,-12.4 8.3,-10.2 2.2,-10.2 1.2,-10.2 0.8,-10.6 0.8,-11.6 0.8,-11.7 1.1,-12 2.1,-12 3.4,-12 4.3,-12.9 4.7,-13.3 8,-13.3 9.4,-13.3 11.1,-15 12.2,-16.1 16,-16.1
GND on Bottom Layer "Bottom Layer-No Net" (solid, pour order 21): 24.6,-29.8 23.1,-31.3 22.3,-31.3 18.4,-31.3 18.2,-31.5 18.1,-31.6 18.1,-32.1 18.1,-32.3 18.3,-32.5 18.5,-32.7 20.6,-32.7 24.7,-32.7 25.1,-32.3 25.2,-32.2 25.2,-30.6 25.2,-30 25,-29.8 24.6,-29.8
3.3V on Bottom Layer "Bottom Layer-No Net" (solid, pour order 31): 14.752,-8.703 14.752,-10.648 14.6,-10.8 14.5,-10.9 14.5,-12.1 14.5,-13.3 14.9,-13.7 15.3,-14.1 15.9,-14.1 16,-14.1 16.1,-14 16.1,-13.7 16.1,-13.6 15.7,-13.2 15.3,-12.8 15.3,-11.4 15.3,-9.584 15.384,-9.5
GND on Top Layer "Bottom Layer-No Net" (solid, pour order 16): 18.4,-11.5 18.4,-14.9 19.6,-16.1 20.5,-17 23.1,-17 29,-17 29.5,-17.5 29.6,-17.6 29.6,-19 29.6,-19.3 29.7,-19.4 29.8,-19.3 29.9,-19.3 29.9,-17.6 30.3,-17.2 30.3,-16.8 30.3,-15.7 29.9,-15.3 29.8,-15.2 29.2,-15.2 29.1,-15.2 28.4,-14.5 28.3,-14.4 27,-14.4 22.8,-14.4 22.7,-14.5 22.6,-14.6 22.1,-14.6 21.7,-14.6 21.6,-14.5 21.5,-14.4 21.5,-13.4 21.5,-11.5 21.3,-11.3 21.2,-11.3 18.6,-11.3 18.4,-11.5
VCC_MO on Top Layer "Bottom Layer-No Net" (solid, pour order 18): 1.3,-7 3.3,-7 4,-7.7 4.4,-8.1 5.5,-8.1 6.8,-8.1 7.1,-7.8 7.3,-7.6 7.3,-6.1 7.3,-5.9 7.9,-5.3 8.3,-4.9 9.3,-4.9 11.6,-4.9 14.4,-7.7 17.7,-11 21.4,-11 22.2,-11 23,-11.8 23.254,-12.054 23.254,-12.852 23.254,-12.146 23.4,-12 23.4,-11.5 23.4,-11.3 22.5,-10.4 21.3,-9.2 17.9,-9.2 17.8,-9.2 14.4,-5.8 10,-1.4 8.3,-1.4 8.3,-1.3 7.6,-0.6 7.5,-0.5 7.5,5.261 2.6,5.261 2.461,5.261 1.9,4.7 1.8,4.6 1.8,1.4 1.8,-2.6 0.7,-3.7 0.4,-4 0.4,-5.3 0.4,-6.4 0.8,-6.8 1,-7 1.3,-7
VCC_MO on Top Layer "Bottom Layer-No Net" (solid, pour order 22): 29,-4 29,-8.8 28.4,-9.4 27.6,-10.2 27.6,-11.2 27.8,-11.4 28.5,-10.7 31,-8.2 31,-5.4 31,-4 30.8,-3.8 29.2,-3.8
GND on Top Layer "Bottom Layer-No Net" (solid, pour order 24): 24.3,-2.6 24.3,-4.5 24.3,-4.6 24.4,-4.7 25.3,-4.7 26.9,-4.7 27,-4.6 27,-3.7 27,-2.6
GND on Top Layer "Bottom Layer-No Net" (solid, pour order 26): 17.7,-2.6 17.7,-4.4 17.7,-4.6 17.8,-4.7 18.7,-4.7 20.3,-4.7 20.4,-4.6 20.4,-3.5 20.4,-2.6
MB- on Top Layer "Bottom Layer-No Net" (solid, pour order 28): 15.3,5.261 15.3,1.4 15.7,1 18.7,-2 20,-2 20.3,-2 20.9,-2.6 21,-2.7 21,-4.9 21,-6 21.8,-6.8 22.167,-6.8 22.2,-6.833 22.2,-3.9 22.2,-2.8 20.9,-1.5 17.4,2 17.4,4.2 17.4,5.261
MA- on Top Layer "Bottom Layer-No Net" (solid, pour order 30): 20.5,5.261 20.5,-0.7 21.2,-1.4 22.5,-2.7 22.5,-4 22.5,-6.4 23.4,-7.3 25.845,-9.745 25.845,-10.1 25.845,-9.855 26,-9.7 26.1,-9.6 26.1,-9.1 26.1,-9 24.2,-7.1 23.3,-6.2 23.3,-1.9 23.3,-1.8 22.9,-1.4 22.6,-1.4 22.4,-1.4 22.1,-1.1 21.9,-0.9 21.9,0.5 21.9,0.9 22.4,1.4 22.5,1.5 22.5,4 22.5,5.261
GND on Top Layer "Bottom Layer-No Net" (solid, pour order 32): 2.6,-7.6 0.6,-7.6 0.4,-7.8 0.4,-9 0.4,-9.2 0.7,-9.5 0.8,-9.6 2.6,-9.6 3.1,-9.6 3.8,-10.3 4,-10.5 7,-10.5 10,-10.5 10.7,-9.8 10.9,-9.6 10.9,-7.5 10.9,-5.9 10.5,-5.5 10.4,-5.4 9,-5.4 8.6,-5.4 8.4,-5.6 8,-6 8,-7.1 8,-8.3 7.7,-8.6 7.5,-8.8 6.4,-8.8 4.6,-8.8 4,-8.2 3.4,-7.6 2.6,-7.6
GND on Top Layer "Bottom Layer-No Net" (solid, pour order 34): 2.7,-10.2 -4.4,-10.2 -4.851,-10.2 -5.251,-10.6 -5.251,-25.949 -4.3,-26.9 -2.8,-28.4 -0.8,-28.4 0.3,-28.4 1.9,-30 3,-31.1 9.3,-31.1 11.8,-31.1 12.6,-31.9 12.6,-34.1 12.7,-34.2 16.4,-34.2 20.2,-34.2 20.5,-33.9 20.6,-33.8 20.6,-32.9 20.6,-31.7 20.3,-31.4 20.2,-31.3 19.6,-31.3 18.8,-31.3 18.6,-31.1 18.4,-30.9 18.4,-28.8 18.4,-27.3 18.8,-26.9 19.1,-26.6 20.9,-26.6 21.2,-26.6 21.4,-26.4 21.5,-26.3 21.5,-25 21.5,-24.7 20.5,-23.7 20.5,-22.2 20.5,-22 19.3,-20.8 19.2,-20.7 18.7,-20.7 18,-20.7 17.7,-21 17.1,-21.6 15.8,-21.6 15.2,-21.6 14.8,-21.2 14.7,-21.1 14.7,-20 14.7,-19.7 14.6,-19.6 13.5,-19.6 13.4,-19.6 13.3,-19.7 13.3,-20.7 13.3,-21.6 13.2,-21.7 13,-21.9 12.4,-21.9 10.3,-21.9 9.7,-21.3 9.7,-19.7 8.4,-19.7 8.3,-19.8 8.3,-21.8 8.3,-21.9 8.6,-22.2 8.8,-22.4 10,-22.4 16,-22.4 16.5,-22.9 16.6,-23 16.6,-23.7 16.6,-24.5 16.2,-24.9 14.5,-24.9 13.3,-24.9 13.1,-24.7 11.5,-24.7 11.4,-24.8 9,-24.8 8.2,-24.8 8.2,-25.8 8.2,-25.9 8.5,-26.2 9.6,-26.2 15.1,-26.2 16,-27.1 16.7,-27.8 16.7,-28.3 16.7,-28.4 16.6,-28.5 16,-28.5 15.5,-28.5 15.3,-28.7 15.3,-29.7 15.3,-30.3 15.1,-30.5 14.9,-30.7 14,-30.7 13.1,-30.7 12.3,-29.9 11.5,-29.1 9.6,-29.1 2.8,-29.1 1.3,-27.6 1,-27.3 0.2,-27.3 -1.4,-27.3 -1.8,-26.9 -2.4,-26.3 -2.4,-25.2 -2.4,-21.3 -3.4,-20.3 -3.9,-19.8 -3.9,-17 -3.9,-13.5 -3.3,-12.9 -2.4,-12 2.3,-12 3.2,-12 3.5,-11.7 3.5,-10.5 3.5,-10.4 3.3,-10.2
GND on Top Layer "Bottom Layer-No Net" (solid, pour order 23): 23.7,-30.1 23.4,-30.4 23.4,-33.5 23.4,-35.839 23.8,-36.239 31.9,-36.239 36.249,-31.891 36.249,-31.2 36.249,-24.849 35.6,-24.2 32.8,-24.2 31.9,-24.2 31.4,-24.7 31,-25.1 31,-26.9 31,-27.2 31.9,-28.1 32.8,-29 32.8,-31.1 32.8,-31.9 32.4,-32.3 30.9,-33.8 29.9,-33.8 27.9,-33.8 27.6,-34.1 27.5,-34.2 26.5,-34.2 25.8,-34.2 25.5,-33.9 25.2,-33.6 25.2,-32.7 25.2,-30.4 24.9,-30.1
GND on Top Layer "Bottom Layer-No Net" (solid, pour order 25): 11.4,-8.8 11.4,-11.7 11.6,-11.9 12.6,-12.9 12.6,-14.7 12.6,-18.6 13,-19 13.2,-19.2 16.6,-19.2 18.4,-19.2 18.8,-18.8 19,-18.6 19,-17.6 19,-16.943 15.021,-12.964 13.9,-11.843 13.9,-9.2 13.9,-8.8 13.7,-8.6 11.6,-8.6 11.4,-8.8
GND on Top Layer "Bottom Layer-No Net" (solid, pour order 27): 12.1,-11.6 12.1,-13.4 12.1,-13.8 12.2,-13.9 12.3,-14 12.3,-15.1 12.3,-15.2 11.9,-15.6 11.8,-15.7 11.8,-17.8 11.8,-19.2 12.4,-19.8 13.5,-20.9 13.5,-21.9 15,-21.9 14.2,-21.1 14.2,-19.8 14.2,-19.798 13.167,-18.764 13.1,-18.698 13.1,-16.4 13.1,-11.316 12.284,-10.5
3.3V on Top Layer "Bottom Layer-No Net" (solid, pour order 29): 13.7,-10.6 14.7,-11.6 14.7,-12.4 14.7,-13 15,-13.3 15.439,-13.739 15.639,-13.739 15.639,-12.139 15.3,-11.8 15.2,-11.7 15.2,-10.8 15.2,-10.3 14.6,-9.7 13.9,-9.7

## Keep-outs
Keep-Out Layer:
  the board outline again, w0.013

## Silkscreen, mask and mechanical layers (free items; w line width, h text height)
Top Overlay:
  circle w0.013: c-0.001,-30.989 r3.5
  circle w0.013: c-0.001,-30.989 r1.6
  circle w0.013: c30.999,-30.989 r3.5
  circle w0.013: c30.999,-30.989 r1.6
  circle w0.013: c30.999,0.011 r3.5
  circle w0.013: c30.999,0.011 r1.6
  circle w0.013: c-0.001,0.011 r3.5
  circle w0.013: c-0.001,0.011 r1.6
  text "DIO" at 34.2,-20.4 h0.6
  text "CLK" at 34.2,-22.9 h0.6
  text "GND" at 34.3,-25.4 h0.6
  text "RX" at 8.2,-34.7 h0.6 r270
  text "TX" at 10.8,-34.7 h0.6 r270
Bottom Overlay:
  text "MB-" at 27.8,4.4 h1 r90
  text "MB+" at 29.3,4.4 h1 r90
  text "MA-" at 30.8,4.4 h1 r90
  text "MA+" at 32.2,4.4 h1 r90
  text "SWIO" at 29.5,-21.7 h1
  text "12V-24V" at 2.4,-22.5 h1
  text "GND" at 2.4,-23.8 h1
  text "SWCLK" at 29.5,-23.8 h1
  text "GND" at 2.4,-25.1 h1
  text "GND" at 29.4,-25.9 h1
  text "5V" at 2.4,-26.5 h1
  text "CAN H" at 2.4,-27.8 h1
  text "CAN L" at 2.4,-29.2 h1
  text "RX" at 17.9,-32 h1 r90
  text "TX" at 19.9,-32 h1 r90
  text "GND" at 21.9,-32 h1 r90
Mechanical 1:
  lines w0.254: -5.251,-15.489 36.249,-15.489